# Altium PCB classyTKL_MX.PcbDoc (part 1 of 2)
Units mm, origin at the board's own origin, x right, y up, seen from the top; angles counter-clockwise.
Board outline 346.59 x 122.85 mm, 2 copper layers (Component Side, Bottom Layer), stack 1.571 mm thick; 205 components, 130 nets, 864 pads, 54 vias.
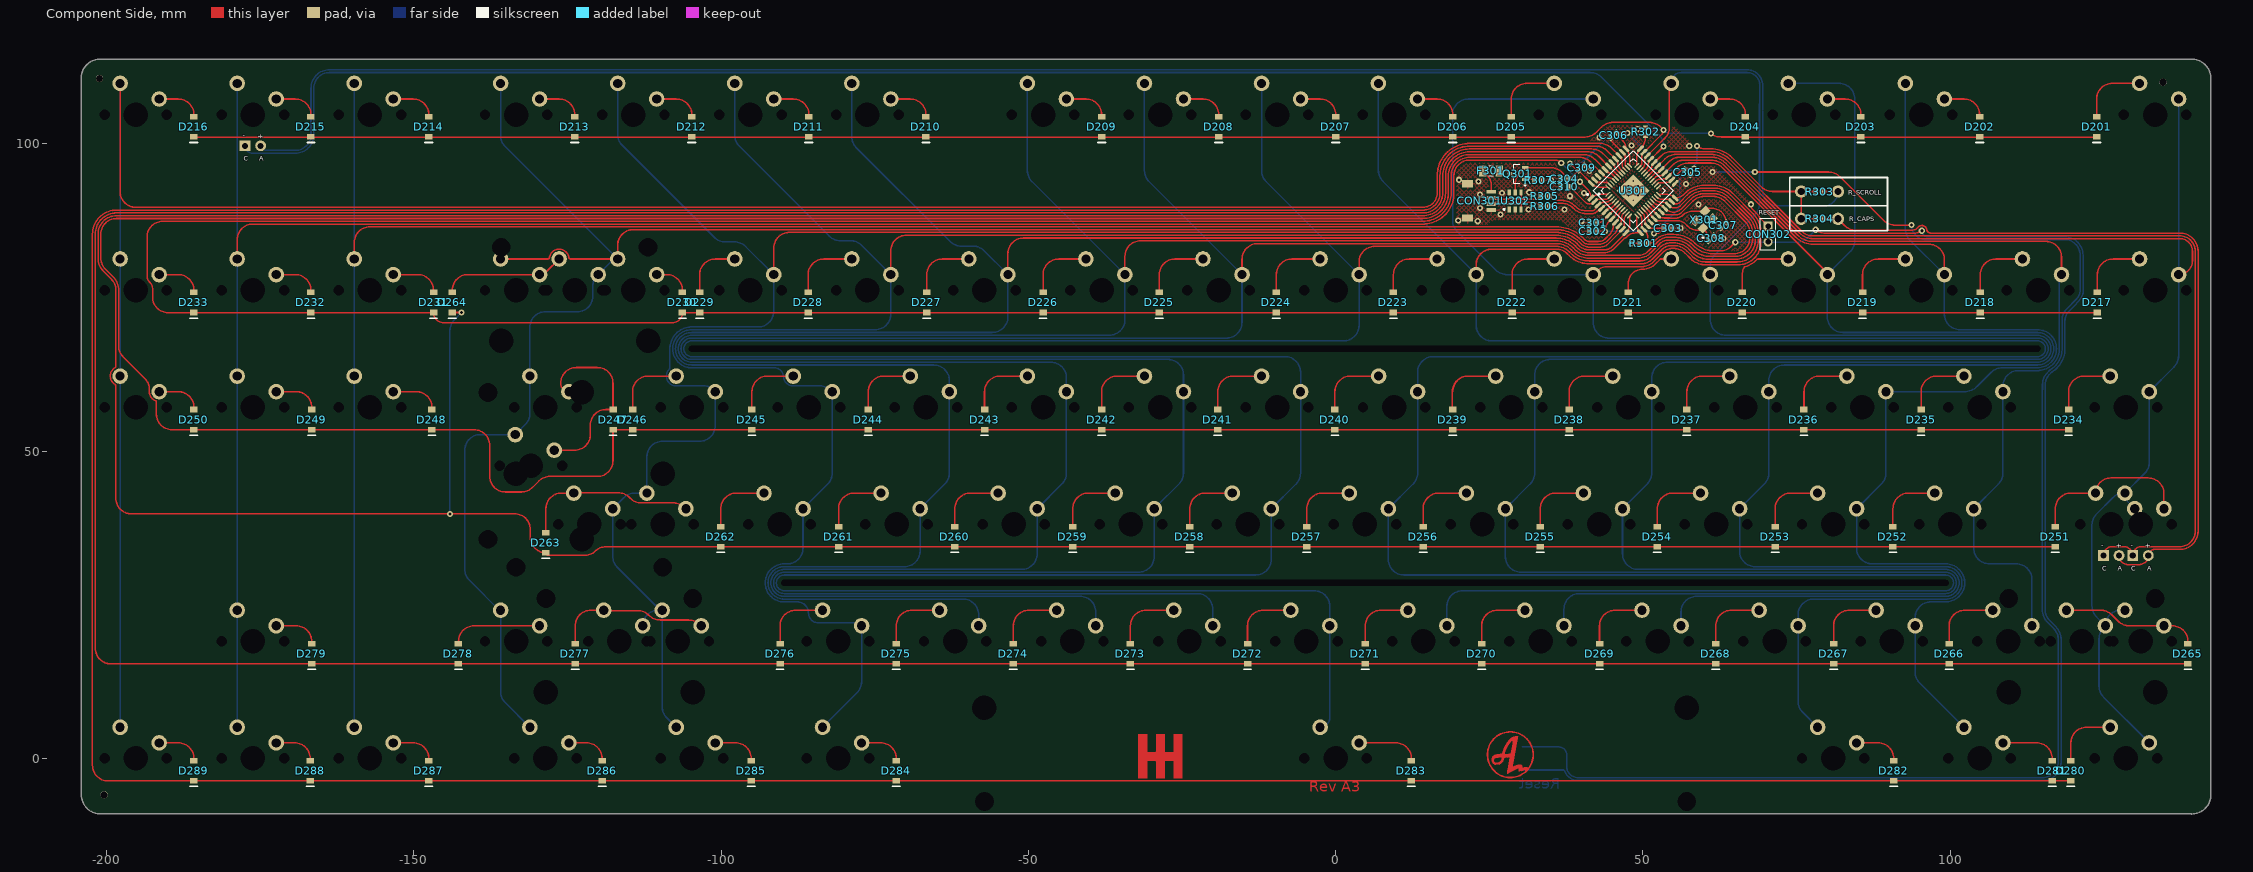
[diagram p0: Component Side view]
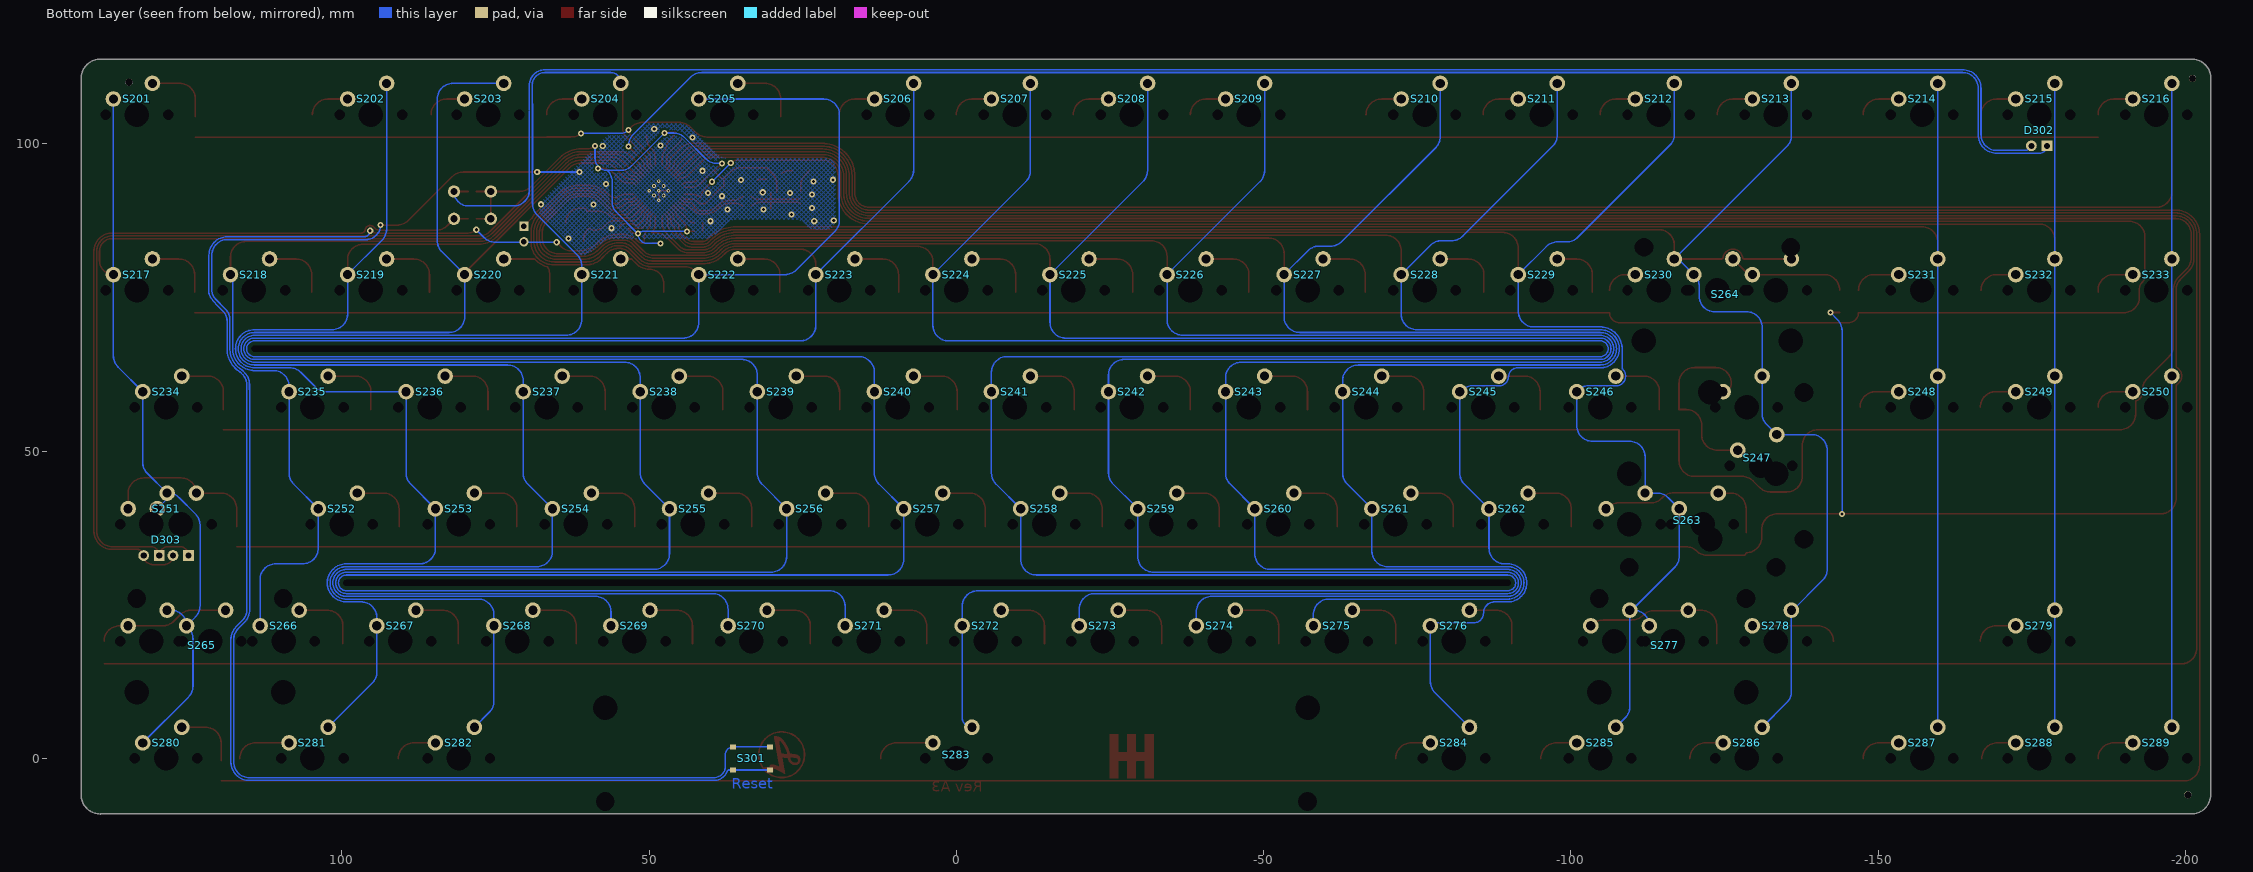
[diagram p1: Bottom Layer view, seen from below]
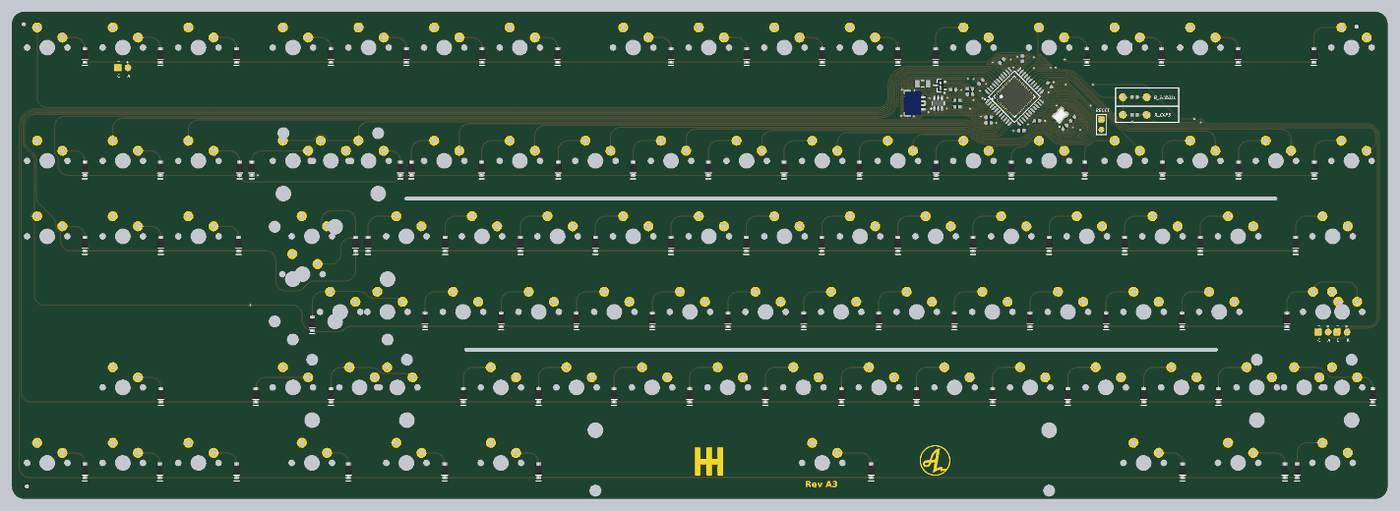
[diagram p3: 3D render of the assembled board from above, using the file's embedded part models]

## Layer stack, top to bottom
Top Solder: solder mask 0.0102, Solder Resist, Dk 3.5
Component Side: signal copper 0.0356
Dielectric 1: core 1.5, FR-4, Dk 4.2
Bottom Layer: signal copper 0.0356
Solder Side: solder mask 0.0102, Solder Resist, Dk 3.5

## Board outline
-204.127,-5.981 cw(c-204.032,-5.896) -204.159,-5.896 -204.159,110.685 cw(c-201.032,110.685) -201.032,113.812 cw(c-201.032,113.685) -200.974,113.798 139.295,113.798 cw(c139.295,110.671) 142.423,110.671 142.423,-5.883 cw(c142.299,-5.915) 142.427,-5.915 cw(c139.299,-5.915) 139.299,-9.042 cw(c139.299,-8.915) 139.233,-9.023 -201,-9.023 cw(c-201,-5.896)

## Design rules (kind name [scope] priority, off if disabled: settings)
Clearance [All] p1: gap=0.2 ignorepadtopadclearanceinfootprint=FALSE except(0: Arc-Hole Track-Hole SMDPad-Hole THPad-Hole Via-Hole Fill-Hole Poly-Hole Region-Hole Text-Hole; 0.254: THPad-THPad THPad-Via THPad-Fill THPad-Poly THPad-Region THPad-Text Via-Via Via-Fill Via-Poly Via-Region Via-Text Fill-Fill Fill-Poly Fill-Region Fill-Text Poly-Poly Poly-Region Poly-Text Region-Region Region-Text Text-Text)
ComponentClearance [InComponent('No Component') And OnLayer('Component Side')] p1: gap=0.254 collisioncheckmode=3 verticalgap=0.254 showdistances=FALSE
DiffPairsRouting DiffPairsRouting_USB [InDifferentialPairClass('All Differential Pairs')] p1: maxlimit=0.254 minlimit=0.203 mostfreqgap=0.203 toplayer_minwidth=0.152 toplayer_maxwidth=0.381 toplayer_prefwidth=0.152 bottomlayer_minwidth=0.152 bottomlayer_maxwidth=0.381 bottomlayer_prefwidth=0.152 maxuncoupledlength=12.7
DiffPairsRouting [All] p2: maxlimit=0.254 minlimit=0.254 mostfreqgap=0.254 toplayer_minwidth=0.381 toplayer_maxwidth=0.381 toplayer_prefwidth=0.381 bottomlayer_minwidth=0.381 bottomlayer_maxwidth=0.381 bottomlayer_prefwidth=0.381 maxuncoupledlength=12.7
HoleSize [All] p1: absolutevalues=TRUE maxlimit=20 minlimit=0.025 maxpercent=80.000 minpercent=20.000
MatchedLengths MatchedLengths_USB_DiffPairs_1 [All] p1: tolerance=0.127 checknetsindiffpair=TRUE checkdiffpairvsdiffpair=FALSE checkxsignals=FALSE checkothers=FALSE
MatchedLengths MatchedLengths_USB_DiffPairs [All] p2: tolerance=0.127 checknetsindiffpair=TRUE checkdiffpairvsdiffpair=FALSE checkxsignals=FALSE checkothers=FALSE
PolygonConnect PolygonConnect_1 [All vs IsVia] p1: connectstyle=Direct reliefconductorwidth=0.254 reliefentries=4 polygonreliefangle="90 Angle" airgapwidth=0.254
PolygonConnect [All] p2: connectstyle=Relief reliefconductorwidth=0.254 reliefentries=4 polygonreliefangle="90 Angle" airgapwidth=0.254
RoutingVias [All] p1: holewidth=0.711 width=1.27 viastyle="Through Hole" minholewidth=0.711 minwidth=1.27 maxholewidth=0.711 maxwidth=1.27
SolderMaskExpansion [All] p1: expansion=0.102 istentingtop=FALSE
Width [All] p1: maxlimit=0.254 minlimit=0.203 preferedwidth=0.254
27 further rules are at their usual default settings.

## Classes and differential pairs
component class Designator: C201 C202 C203 C204 C205 C206 D201 D202 D203 D204 D205 D206 D207 D208 D209 D210 D211 D212 D213 D214 D215 D216 D217 D218 D219 D220 D221 D222 D223 D224 D225 D226 D227 D228 D229 D230 D231 D232 D233 D234 D235 D236 D237 D238 D239 D240 D241 D242 D243 D244 D245 D246 D247 D248 D249 D250 D251 D252 D253 D254 D255 D256 D257 D258 D259 D260 D261 D262 D263 D264 D265 D266 D267 D268 D269 D270 D271 D272 D273 D274 D275 D276 D277 D278 D279 D280 D281 D282 D283 D284 D286 D287 D288 D289 S201 S202 S203 S204 S205 S206 S207 S208 S209 S210 S211 S212 S213 S214 S215 S216 S217 S218 S219 S220 S221 S222 S223 S224 S225 S226 S227 S228 S229 S230 S231 S232 S233 S234 S235 S236 S237 S238 S239 S240 S241 S242 S243 S244 S245 S246 S247 S248 S249 S250 S251 S252 S253 S254 S255 S256 S257 S258 S259 S260 S261 S262 S263 S264 S265 S266 S267 S268 S269 S270 S271 S272 S273 S274 S275 S276 S277 S278 S279 S280 S281 S282 S283 S284 S286 S287 S288 S289
differential pair D: +D_P -D_N
differential pair D_PRE: +D_PRE_P -D_PRE_N

## Components (designator, comment, footprint, x,y, rotation, side; value= is the part's Value field where it differs from the comment)
C301 "" C0603[1608] 41.915,87.178 r0 top value=1uF
C302 "" C0603[1608] 41.915,85.781 r0 top value=0.1uF
C303 "" C0603[1608] 54.107,86.289 r180 top value=0.1uF
C304 "" C0603[1608] 37.211,94.361 r0 top value=4,7uF
C305 "" C0603[1608] 57.277,95.377 r135 top value=0.1uF
C306 "" C0603[1608] 45.217,101.402 r45 top value=0.1uF
C307 "" C0603[1608] 63.076,86.749 r45 top value=15pF
C308 "" C0603[1608] 61.092,84.638 r225 top value=15pF
C309 "" C0603[1608] 40.005,96.139 r225 top value=0.1uF
C310 "" C0603[1608] 37.216,93.02 r0 top value=0.1uF
CON301 "Header 5" "JST SM04B-SRSS-TB" 21.468,93.54 r270 top
CON302 "Header 2" HDR1X2 70.358,86.614 r270 top
D201 "Diode" SOD-123 123.83,102.775 r90 top
D202 "Diode" SOD-123 104.78,102.775 r90 top
D203 "Diode" SOD-123 85.476,102.775 r90 top
D204 "Diode" SOD-123 66.68,102.775 r90 top
D205 "Diode" SOD-123 28.58,102.775 r90 top
D206 "Diode" SOD-123 19.055,102.775 r90 top
D207 "Diode" SOD-123 0.005,102.775 r90 top
D208 "Diode" SOD-123 -19.045,102.775 r90 top
D209 "Diode" SOD-123 -38.095,102.775 r90 top
D210 "Diode" SOD-123 -66.67,102.775 r90 top
D211 "Diode" SOD-123 -85.72,102.775 r90 top
D212 "Diode" SOD-123 -104.77,102.775 r90 top
D213 "Diode" SOD-123 -123.82,102.775 r90 top
D214 "Diode" SOD-123 -147.569,102.775 r90 top
D215 "Diode" SOD-123 -166.746,102.775 r90 top
D216 "Diode" SOD-123 -185.796,102.775 r90 top
D217 "Diode" SOD-123 123.957,74.2 r90 top
D218 "Diode" SOD-123 104.907,74.2 r90 top
D219 "Diode" SOD-123 85.73,74.2 r90 top
D220 "Diode" SOD-123 66.172,74.2 r90 top
D221 "Diode" SOD-123 47.63,74.2 r90 top
D222 "Diode" SOD-123 28.707,74.2 r90 top
D223 "Diode" SOD-123 9.403,74.2 r90 top
D224 "Diode" SOD-123 -9.647,74.2 r90 top
D225 "Diode" SOD-123 -28.697,74.2 r90 top
D226 "Diode" SOD-123 -47.62,74.2 r90 top
D227 "Diode" SOD-123 -66.543,74.2 r90 top
D228 "Diode" SOD-123 -85.847,74.2 r90 top
D229 "Diode" SOD-123 -103.5,74.2 r90 top
D230 "Diode" SOD-123 -106.294,74.2 r90 top
D231 "Diode" SOD-123 -146.807,74.2 r90 top
D232 "Diode" SOD-123 -166.746,74.2 r90 top
D233 "Diode" SOD-123 -185.796,74.2 r90 top
D234 "Diode" SOD-123 119.258,55.15 r90 top
D235 "Diode" SOD-123 95.255,55.15 r90 top
D236 "Diode" SOD-123 76.205,55.15 r90 top
D237 "Diode" SOD-123 57.155,55.15 r90 top
D238 "Diode" SOD-123 37.978,55.15 r90 top
D239 "Diode" SOD-123 19.055,55.15 r90 top
D240 "Diode" SOD-123 -0.122,55.15 r90 top
D241 "Diode" SOD-123 -19.172,55.15 r90 top
D242 "Diode" SOD-123 -38.095,55.15 r90 top
D243 "Diode" SOD-123 -57.145,55.15 r90 top
D244 "Diode" SOD-123 -76.068,55.15 r90 top
D245 "Diode" SOD-123 -94.991,55.15 r90 top
D246 "Diode" SOD-123 -114.422,55.15 r90 top
D247 "Diode" SOD-123 -117.597,55.15 r90 top
D248 "Diode" SOD-123 -147.061,55.15 r90 top
D249 "Diode" SOD-123 -166.619,55.15 r90 top
D250 "Diode" SOD-123 -185.796,55.15 r90 top
D251 "Diode" SOD-123 117.099,36.1 r90 top
D252 "Diode" SOD-123 90.683,36.1 r90 top
D253 "Diode" SOD-123 71.506,36.1 r90 top
D254 "Diode" SOD-123 52.329,36.1 r90 top
D255 "Diode" SOD-123 33.279,36.1 r90 top
D256 "Diode" SOD-123 14.229,36.1 r90 top
D257 "Diode" SOD-123 -4.694,36.1 r90 top
D258 "Diode" SOD-123 -23.744,36.1 r90 top
D259 "Diode" SOD-123 -42.794,36.1 r90 top
D260 "Diode" SOD-123 -61.971,36.1 r90 top
D261 "Diode" SOD-123 -80.894,36.1 r90 top
D262 "Diode" SOD-123 -100.071,36.1 r90 top
D263 "Diode" SOD-123 -128.519,35.108 r90 top
D264 "Diode" SOD-123 -143.759,74.2 r90 top
D265 "Diode" SOD-123 138.689,17.05 r90 top
D266 "Diode" SOD-123 99.827,17.05 r90 top
D267 "Diode" SOD-123 81.031,17.05 r90 top
D268 "Diode" SOD-123 61.854,17.05 r90 top
D269 "Diode" SOD-123 42.931,17.05 r90 top
D270 "Diode" SOD-123 23.754,17.05 r90 top
D271 "Diode" SOD-123 4.831,17.05 r90 top
D272 "Diode" SOD-123 -14.346,17.05 r90 top
D273 "Diode" SOD-123 -33.396,17.05 r90 top
D274 "Diode" SOD-123 -52.446,17.05 r90 top
D275 "Diode" SOD-123 -71.496,17.05 r90 top
D276 "Diode" SOD-123 -90.419,17.05 r90 top
D277 "Diode" SOD-123 -123.75,17.05 r90 top
D278 "Diode" SOD-123 -142.743,17.05 r90 top
D279 "Diode" SOD-123 -166.619,17.05 r90 top
D280 "Diode" SOD-123 119.639,-2 r90 top
D281 "Diode" SOD-123 116.591,-2 r90 top
D282 "Diode" SOD-123 90.81,-2 r90 top
D283 "Diode" SOD-123 12.324,-2 r90 top
D284 "Diode" SOD-123 -71.496,-2 r90 top
D285 "Diode" SOD-123 -95.118,-2 r90 top
D286 "Diode" SOD-123 -119.375,-2 r90 top
D287 "Diode" SOD-123 -147.569,-2 r90 top
D288 "Diode" SOD-123 -166.873,-2 r90 top
D289 "Diode" SOD-123 -185.796,-2 r90 top
D302 "LED0" "MX-SWITCH - LED" -176.213,104.775 r180 bottom
D303 "LED0" "MX-SWITCH - CAPS - LED NO SWITCH" 126.205,38.1 r180 bottom locked
F301 "Fuse" C1206[3216] 25.273,95.631 r0 top
Q301 "PMOS-2" SOT-23-3 29.639,95.179 r180 top
R301 "Res1" R0603[1608] 50.165,83.82 r0 top value=10K
R302 "Res1" R0603[1608] 50.419,101.981 r90 top value=10K
R303 "Res1" "R0603[1608] - THT" 78.745,92.258 r0 top value=150
R304 "Res1" "R0603[1608] - THT" 78.745,87.813 r0 top value=150
R305 "Res1" R0603[1608] 34.041,91.496 r180 top value=22
R306 "Res1" R0603[1608] 34.041,89.845 r180 top value=22
R307 "Res1" R0603[1608] 33.02,94.107 r0 top value=10K
S201 "MX" "MX-SWITCH - SWITCHED POL" 133.349,104.775 r180 bottom locked
S202 "MX" MX-SWITCH 95.249,104.775 r180 bottom locked
S203 "MX" MX-SWITCH 76.199,104.775 r180 bottom locked
S204 "MX" MX-SWITCH 57.149,104.775 r180 bottom locked
S205 "MX" "MX-switch - switched pol" 38.099,104.775 r180 bottom locked
S206 "MX" MX-SWITCH 9.494,104.775 r180 bottom locked
S207 "MX" MX-SWITCH -9.526,104.775 r180 bottom locked
S208 "MX" MX-SWITCH -28.576,104.775 r180 bottom locked
S209 "MX" MX-SWITCH -47.626,104.775 r180 bottom locked
S210 "MX" MX-SWITCH -76.201,104.775 r180 bottom locked
S211 "MX" MX-SWITCH -95.251,104.775 r180 bottom locked
S212 "MX" MX-SWITCH -114.301,104.775 r180 bottom locked
S213 "MX" MX-SWITCH -133.351,104.775 r180 bottom locked
S214 "MX" MX-SWITCH -157.162,104.775 r180 bottom locked
S215 "MX" MX-SWITCH -176.213,104.775 r180 bottom locked
S216 "MX" MX-SWITCH -195.263,104.775 r180 bottom locked
S217 "MX" "MX-SWITCH - SWITCHED POL" 133.349,76.2 r180 bottom locked
S218 "MX" "MX-SWITCH - SWITCHED POL" 114.299,76.2 r180 bottom locked
S219 "MX" "MX-SWITCH - SWITCHED POL" 95.249,76.2 r180 bottom locked
S220 "MX" "MX-SWITCH - SWITCHED POL" 76.199,76.2 r180 bottom locked
S221 "MX" "MX-SWITCH - SWITCHED POL" 57.149,76.2 r180 bottom locked
S222 "MX" "MX-SWITCH - SWITCHED POL" 38.099,76.2 r180 bottom locked
S223 "MX" "MX-SWITCH - SWITCHED POL" 19.049,76.2 r180 bottom locked
S224 "MX" "MX-SWITCH - SWITCHED POL" -0.001,76.2 r180 bottom locked
S225 "MX" "MX-SWITCH - SWITCHED POL" -19.051,76.2 r180 bottom locked
S226 "MX" "MX-SWITCH - SWITCHED POL" -38.101,76.2 r180 bottom
S227 "MX" "MX-SWITCH - SWITCHED POL" -57.151,76.2 r180 bottom locked
S228 "MX" "MX-SWITCH - SWITCHED POL" -76.201,76.2 r180 bottom locked
S229 "MX" "MX-SWITCH - SWITCHED POL" -95.251,76.2 r180 bottom locked
S230 "MX" MX-SWITCH -114.301,76.2 r180 bottom locked
S231 "MX" MX-SWITCH -157.162,76.2 r180 bottom locked
S232 "MX" MX-SWITCH -176.213,76.2 r180 bottom locked
S233 "MX" MX-SWITCH -195.263,76.2 r180 bottom locked
S234 "MX" "MX-SWITCH - 1.5U - SWITCHED POL" 128.587,57.15 r180 bottom locked
S235 "MX" "MX-SWITCH - SWITCHED POL" 104.774,57.15 r180 bottom locked
S236 "MX" "MX-SWITCH - SWITCHED POL" 85.724,57.15 r180 bottom locked
S237 "MX" "MX-SWITCH - SWITCHED POL" 66.674,57.15 r180 bottom locked
S238 "MX" "MX-SWITCH - SWITCHED POL" 47.624,57.15 r180 bottom locked
S239 "MX" "MX-SWITCH - SWITCHED POL" 28.574,57.15 r180 bottom locked
S240 "MX" "MX-SWITCH - SWITCHED POL" 9.524,57.15 r180 bottom locked
S241 "MX" "MX-SWITCH - SWITCHED POL" -9.526,57.15 r180 bottom locked
S242 "MX" "MX-SWITCH - SWITCHED POL" -28.576,57.15 r180 bottom locked
S243 "MX" "MX-SWITCH - SWITCHED POL" -47.626,57.15 r180 bottom locked
S244 "MX" "MX-SWITCH - SWITCHED POL" -66.676,57.15 r180 bottom locked
S245 "MX" "MX-SWITCH - SWITCHED POL" -85.726,57.15 r180 bottom locked
S246 "MX" "MX-SWITCH - SWITCHED POL" -104.776,57.15 r180 bottom locked
S247 "MX" "MX-SWITCH - PIPE_ISO_ENTER" -128.588,57.15 r0 bottom locked
S248 "MX" MX-SWITCH -157.162,57.15 r180 bottom locked
S249 "MX" MX-SWITCH -176.213,57.15 r180 bottom locked
S250 "MX" MX-SWITCH -195.263,57.15 r180 bottom locked
S251 "MX" "MX-SWITCH - CAPS" 126.206,38.1 r180 bottom locked
S252 "MX" "MX-SWITCH - SWITCHED POL" 100.012,38.1 r180 bottom locked
S253 "MX" "MX-SWITCH - SWITCHED POL" 80.962,38.1 r180 bottom locked
S254 "MX" "MX-SWITCH - SWITCHED POL" 61.912,38.1 r180 bottom locked
S255 "MX" "MX-SWITCH - SWITCHED POL" 42.862,38.1 r180 bottom locked
S256 "MX" "MX-SWITCH - SWITCHED POL" 23.812,38.1 r180 bottom locked
S257 "MX" "MX-SWITCH - SWITCHED POL" 4.762,38.1 r180 bottom locked
S258 "MX" "MX-SWITCH - SWITCHED POL" -14.288,38.1 r180 bottom locked
S259 "MX" "MX-SWITCH - SWITCHED POL" -33.338,38.1 r180 bottom locked
S260 "MX" "MX-SWITCH - SWITCHED POL" -52.388,38.1 r180 bottom locked
S261 "MX" "MX-SWITCH - SWITCHED POL" -71.438,38.1 r180 bottom locked
S262 "MX" "MX-SWITCH - SWITCHED POL" -90.488,38.1 r180 bottom locked
S263 "MX" "MX-switch - Enter_ANSI_ISO_KEY" -121.451,38.1 r180 bottom locked
S264 "MX" "MX-SWITCH - BACKSPACE" -123.826,76.2 r180 bottom locked
S265 "MX" "MX-switch - Left shift" 121.443,19.05 r180 bottom locked
S266 "MX" "MX-SWITCH - SWITCHED POL" 109.479,19.05 r180 bottom locked
S267 "MX" "MX-SWITCH - SWITCHED POL" 90.487,19.05 r180 bottom locked
S268 "MX" "MX-SWITCH - SWITCHED POL" 71.437,19.05 r180 bottom locked
S269 "MX" "MX-SWITCH - SWITCHED POL" 52.387,19.05 r180 bottom locked
S270 "MX" "MX-SWITCH - SWITCHED POL" 33.337,19.05 r180 bottom locked
S271 "MX" "MX-SWITCH - SWITCHED POL" 14.287,19.05 r180 bottom locked
S272 "MX" "MX-SWITCH - SWITCHED POL" -4.763,19.05 r180 bottom locked
S273 "MX" "MX-SWITCH - SWITCHED POL" -23.813,19.05 r180 bottom locked
S274 "MX" "MX-SWITCH - SWITCHED POL" -42.862,19.05 r180 bottom locked
S275 "MX" "MX-SWITCH - SWITCHED POL" -61.913,19.05 r180 bottom locked
S276 "MX" "MX-SWITCH - SWITCHED POL" -80.963,19.05 r180 bottom locked
S277 "MX" "MX-SWITCH - RIGHT SHIFT" -116.581,19.05 r180 bottom locked
S278 "MX" MX-switch -133.351,19.05 r180 bottom locked
S279 "MX" MX-SWITCH -176.213,19.05 r180 bottom locked
S280 "MX" "MX-switch - 1.5U - switched pol" 128.587,0 r180 bottom locked
S281 "MX" MX-SWITCH 104.775,0 r180 bottom locked
S282 "MX" "MX-switch - 1.5U" 80.962,0 r180 bottom locked
S283 "MX" "MX-SWITCH - 7U SPACE" 0,0 r0 bottom locked
S284 "MX" "MX-switch - 1.5U" -80.962,0 r180 bottom locked
S285 "MX" MX-SWITCH -104.775,0 r180 bottom
S286 "MX" "MX-switch - 1.5U" -128.588,0 r180 bottom locked
S287 "MX" MX-SWITCH -157.163,0 r180 bottom locked
S288 "MX" MX-SWITCH -176.213,0 r180 bottom locked
S289 "MX" MX-SWITCH -195.263,0 r180 bottom locked
S301 "SW-PB" "XKB Switch" 33.337,0 r0 bottom
U301 "ATMEGA32U4" ATMEGA32U4-COMBO 48.411,92.392 r45 top
U302 "SRV05" SOT-23-6 29.215,90.734 r90 top
X301 "XTAL" XTAL-3225 59.949,87.686 r45 top

## Footprints (in the part's own frame and the unit in brackets; to place one, negate y for a bottom-side part, rotate by r counter-clockwise, add the part's x,y. Pads: shape width x height; smd on the part's side, far side on the other; paste and mask are expansions set on the pad)
ATMEGA32U4-COMBO [mm] "QFP, 44-Leads, Body 9,95x9,95mm, Pitch 0,80mm, IPC Medium Density"
  rect 1.35x0.5 smd: 1(-5.675,4)
  oval 1.05x0.25 smd: 1(-3.325,2.5) 2(-3.325,2) 3(-3.325,1.5) 4(-3.325,1) 5(-3.325,0.5) 6(-3.325,0) 7(-3.325,-0.5) 8(-3.325,-1) 9(-3.325,-1.5) 10(-3.325,-2) 11(-3.325,-2.5) 23(3.325,-2.5) 24(3.325,-2) 25(3.325,-1.5) 26(3.325,-1) 27(3.325,-0.5) 28(3.325,0) 29(3.325,0.5) 30(3.325,1) 31(3.325,1.5) 32(3.325,2) 33(3.325,2.5)
  oval 1.35x0.5 smd: 2(-5.675,3.2) 3(-5.675,2.4) 4(-5.675,1.6) 5(-5.675,0.8) 6(-5.675,0) 7(-5.675,-0.8) 8(-5.675,-1.6) 9(-5.675,-2.4) 10(-5.675,-3.2) 11(-5.675,-4) 23(5.675,-4) 24(5.675,-3.2) 25(5.675,-2.4) 26(5.675,-1.6) 27(5.675,-0.8) 28(5.675,0) 29(5.675,0.8) 30(5.675,1.6) 31(5.675,2.4) 32(5.675,3.2) 33(5.675,4)
  oval 0.5x1.35 smd: 12(-4,-5.675) 13(-3.2,-5.675) 14(-2.4,-5.675) 15(-1.6,-5.675) 16(-0.8,-5.675) 17(0,-5.675) 18(0.8,-5.675) 19(1.6,-5.675) 20(2.4,-5.675) 21(3.2,-5.675) 22(4,-5.675) 34(4,5.675) 35(3.2,5.675) 36(2.4,5.675) 37(1.6,5.675) 38(0.8,5.675) 39(0,5.675) 40(-0.8,5.675) 41(-1.6,5.675) 42(-2.4,5.675) 43(-3.2,5.675) 44(-4,5.675)
  oval 0.25x1.05 smd: 12(-2.5,-3.325) 13(-2,-3.325) 14(-1.5,-3.325) 15(-1,-3.325) 16(-0.5,-3.325) 17(0,-3.325) 18(0.5,-3.325) 19(1,-3.325) 20(1.5,-3.325) 21(2,-3.325) 22(2.5,-3.325) 34(2.5,3.325) 35(2,3.325) 36(1.5,3.325) 37(1,3.325) 38(0.5,3.325) 39(0,3.325) 40(-0.5,3.325) 41(-1,3.325) 42(-1.5,3.325) 43(-2,3.325) 44(-2.5,3.325)
  rect 3.81x3.81 smd paste-1000: 43(0,0)
  silkscreen extent -5.8,-4.6 4.6,4.92, body extent -3.6,-3.6 3.6,3.6, height 1
C0603[1608] [mm] "Chip Resistor, 2-Leads, Body 1,57x0,80mm, IPC Medium Density"
  rect 0.8x0.85 smd: 1(-0.65,0) 2(0.65,0)
  body extent -0.83,-0.43 0.82,0.43, height 0.5
C1206[3216] [mm]
  rect 1.2x1.8 smd: 1(-1.35,0) 2(1.35,0)
  silkscreen extent -0.35,-0.8 0.35,0.8, body extent -1.6,-0.9 1.6,0.9, height 1.2
HDR1X2 [mm] "Connector; Header; 2 Position"
  rect 1.5x1.5 hole 0.9 mask+0.102: 1(0,0)
  round 1.5 hole 0.9 mask+0.102: 2(2.54,0)
  silkscreen extent -1.27,-1.27 3.81,1.27
"JST SM04B-SRSS-TB" [mm]
  rect 0.6x1.55 smd: 1(1.3,3.875) 2(2.3,3.875) 3(3.3,3.875) 4(4.3,3.875)
  rect 1.2x1.8 smd: 5(0,0) 5(5.6,0)
  body extent -0.21,-0.76 5.79,4.19, height 3.25
MX-SWITCH [mm]
  round 2.54 hole 1.499 mask+0.102: 1(-3.81,2.54) 2(2.54,5.08)
  round 1 hole 1.702 unplated: ""(-5.08,0) ""(5.08,0)
  round 1 hole 3.988 unplated: ""(0,0)
MX-switch [mm]
  round 2.54 hole 1.499 mask+0.102: 1(-3.81,2.54) 2(2.54,5.08)
  round 1 hole 1.702 unplated: ""(-5.08,0) ""(5.08,0)
  round 1 hole 3.988 unplated: ""(0,0)
"MX-switch - 1.5U" [mm]
  round 2.54 hole 1.499 mask+0.102: 1(-3.81,2.54) 2(2.54,5.08)
  round 1 hole 1.702 unplated: ""(-5.08,0) ""(5.08,0)
  round 1 hole 3.988 unplated: ""(0,0)
  round 1 on Mech14: ""(0,0)
"MX-SWITCH - 1.5U - SWITCHED POL" [mm]
  round 2.54 hole 1.499 mask+0.102: 1(2.54,5.08) 2(-3.81,2.54)
  round 1 hole 1.702 unplated: ""(-5.08,0) ""(5.08,0)
  round 1 hole 3.988 unplated: ""(0,0)
  round 1 on Mech14: ""(0,0)
"MX-switch - 1.5U - switched pol" [mm]
  round 2.54 hole 1.499 mask+0.102: 1(2.54,5.08) 2(-3.81,2.54)
  round 1 hole 1.702 unplated: ""(-5.08,0) ""(5.08,0)
  round 1 hole 3.988 unplated: ""(0,0)
  round 1 on Mech14: ""(0,0)
"MX-SWITCH - 7U SPACE" [mil]
  round 100 hole 59 mask+4: 1(150,-100) 2(-100,-200)
  round 60 hole 157.01 unplated: ""(-2250,-325) ""(2250,-325)
  round 60 hole 120 unplated: ""(-2250,275) ""(2250,275)
  round 39.37 hole 67.01 unplated: ""(-200,0) ""(200,0)
  round 39.37 hole 157.01 unplated: ""(0,0)
  round 39.37 on Mech14: ""(0,0)
"MX-SWITCH - BACKSPACE" [mil]
  round 100 hole 59 mask+4: 1(100,200) 1(225,100) 2(-150,100) 2(475,200)
  round 60 hole 157.01 unplated: ""(-470,-325) ""(470,-325)
  round 60 hole 120 unplated: ""(-470,275) ""(470,275)
  round 39.37 hole 67.01 unplated: ""(-200,0) ""(175,0) ""(200,0) ""(575,0)
  round 39.37 hole 157.01 unplated: ""(0,0) ""(375,0)
  round 39.37 on Mech14: ""(0,0) ""(375,0)
"MX-SWITCH - CAPS" [mm]
  round 2.54 hole 1.499 mask+0.102: 1(-8.572,2.54) 1(2.54,5.08) 2(-3.81,2.54) 2(-2.222,5.08)
  round 1 hole 1.702 unplated: ""(-9.842,0) ""(5.08,0)
  round 1 hole 3.988 unplated: ""(-4.763,0) ""(0,0)
  round 1 on Mech14: ""(-4.763,0) ""(0,0)
"MX-SWITCH - CAPS - LED NO SWITCH" [mm]
  round 1.75 hole 1 mask+0.102: 1(-6.033,-5.08) 1(-1.27,-5.08)
  rect 1.75x1.75 hole 1 mask+0.102: 2(-3.493,-5.08) 2(1.27,-5.08)
  round 1 on Mech14: ""(0,0)
"MX-switch - Enter_ANSI_ISO_KEY" [mm]
  round 2.54 hole 1.499 mask+0.102: 1(-15.716,2.54) 1(2.54,5.08) 2(-9.366,5.08) 2(-3.81,2.54)
  round 1 hole 1.702 unplated: ""(-16.986,0) ""(-6.826,0) ""(-5.08,0) ""(5.08,0)
  round 1.524 hole 3.048 unplated: ""(-11.938,-6.985) ""(11.938,-6.985)
  round 1.524 hole 3.988 unplated: ""(-11.938,8.255) ""(11.938,8.255)
  round 1 hole 3.988 unplated: ""(-11.906,0) ""(0,0)
  round 1 on Mech14: ""(-11.906,0) ""(-11.906,0) ""(0,0) ""(0,0)
"MX-SWITCH - LED" [mm]
  round 1.75 hole 1 mask+0.102: 1(-1.27,-5.08)
  rect 1.75x1.75 hole 1 mask+0.102: 2(1.27,-5.08)
  round 1 on Mech14: ""(0,0)
"MX-switch - Left shift" [mil]
  round 100 hole 59 mask+4: 1(-525,100) 1(100,200) 2(-275,200) 2(-150,100)
  round 39.37 hole 67.01 unplated: ""(-575,0) ""(-200,0) ""(-175,0) ""(200,0)
  round 60 hole 157.01 unplated: ""(-470,-325) ""(470,-325)
  round 60 hole 120 unplated: ""(-470,275) ""(470,275)
  round 39.37 hole 157.01 unplated: ""(-375,0) ""(0,0)
  round 39.37 on Mech14: ""(-375,0) ""(0,0)
"MX-SWITCH - PIPE_ISO_ENTER" [mm]
  round 2.54 hole 1.499 mask+0.102: 1(1.429,6.985) 1(3.81,-2.54) 2(-4.921,4.445) 2(-2.54,-5.08)
  round 1.524 hole 3.048 unplated: ""(-9.366,-2.413) ""(-9.366,21.463)
  round 1 hole 1.702 unplated: ""(-7.461,9.525) ""(-5.08,0) ""(2.699,9.525) ""(5.08,0)
  round 1 hole 3.988 unplated: ""(-2.381,9.525) ""(0,0)
  round 1 on Mech14: ""(-2.381,9.525) ""(-2.381,9.525) ""(0,0) ""(0,0)
  round 1.524 hole 3.988 unplated: ""(5.874,-2.413) ""(5.874,21.463)
"MX-SWITCH - RIGHT SHIFT" [mil]
  round 100 hole 59 mask+4: 1(-525,100) 1(100,200) 2(-275,200) 2(-150,100)
  round 39.37 hole 67.01 unplated: ""(-575,0) ""(-200,0) ""(-175,0) ""(200,0)
  round 60 hole 157.01 unplated: ""(-470,-325) ""(470,-325)
  round 60 hole 120 unplated: ""(-470,275) ""(470,275)
  round 39.37 hole 157.01 unplated: ""(-375,0) ""(0,0)
  round 39.37 on Mech14: ""(-375,0) ""(0,0)
"MX-SWITCH - SWITCHED POL" [mm]
  round 2.54 hole 1.499 mask+0.102: 1(2.54,5.08) 2(-3.81,2.54)
  round 1 hole 1.702 unplated: ""(-5.08,0) ""(5.08,0)
  round 1 hole 3.988 unplated: ""(0,0)
"MX-switch - switched pol" [mm]
  round 2.54 hole 1.499 mask+0.102: 1(2.54,5.08) 2(-3.81,2.54)
  round 1 hole 1.702 unplated: ""(-5.08,0) ""(5.08,0)
  round 1 hole 3.988 unplated: ""(0,0)
R0603[1608] [mm] "Chip Resistor, 2-Leads, Body 1,57x0,80mm, IPC Medium Density"
  rect 0.8x0.85 smd: 1(-0.65,0) 2(0.65,0)
  body extent -0.83,-0.43 0.82,0.43, height 0.5
"R0603[1608] - THT" [mm] "Chip Resistor, 2-Leads, Body 1,57x0,80mm, IPC Medium Density"
  round 2 hole 1.2: 1(-3,0) 2(3,0)
  rect 0.8x0.85 smd: 1(-0.65,0) 2(0.65,0)
  body extent -0.83,-0.43 0.82,0.43, height 0.5
SOD-123 [mm]
  rect 0.91x1.22 smd: 1(1.635,0) 2(-1.635,0)
  silkscreen extent -2.54,-0.64 -2.54,0.63, body extent -1.87,-0.85 1.88,0.85, height 1.2
SOT-23-3 [mm] "3.3v regulator, used in Windsond S2 proto 1"
  rect 1x0.55 smd: 1(-1.2,0.95) 2(-1.2,-0.95) 3(1.2,0)
  silkscreen extent -1.33,-1.55 0.7,1.95, body extent -1.45,-1.5 1.1,1.5, height 1
SOT-23-6 [mm]
  rect 1x0.55 smd: 1(-1.375,0.95) 2(-1.375,0) 3(-1.375,-0.95) 4(1.375,-0.95) 5(1.375,0) 6(1.375,0.95)
  silkscreen extent -1.5,-1.55 0.46,1.92, body extent -1.37,-1.44 1.47,1.49, height 1.05
"XKB Switch" [mm] "XKB Enterprise TS-1187A-C-D-B"
  rect 1x0.75 smd: 1(-3,1.875) 1(3,1.875) 2(-3,-1.875) 2(3,-1.875)
  body extent -3.25,-2.55 3.25,2.55, height 2
XTAL-3225 [mm]
  rect 1.4x1.2 smd: 1(-1.1,-0.85) 2(1.1,-0.85) 3(1.1,0.85) 4(-1.1,0.85)
  silkscreen extent -2.28,-2.03 -2.03,-1.78, body extent -1.6,-1.25 1.6,1.25, height 0.65

## Part data
C301: library part Cap, "Capacitor", LCSC MFG="Samsung Electro-Mechanics", LCSC Part #=C15849, MFG=KEMET, MFGPN=C0603C104M5RACTU, MRF.Part=CL10A105KB8NNNC, Version="0603 imperial"
C302 C303 C305 C306 C309 C310: library part Cap, "Capacitor", LCSC MFG=YAGEO, LCSC Part #=C14663, MFG=KEMET, MFGPN=C0603C104M5RACTU, MRF.Part=CC0603KRX7R9BB104, Version="0603 imperial"
C304: library part Cap, "Capacitor", LCSC MFG="Samsung Electro-Mechanics", LCSC Part #=C19666, MRF.Part=CL10A475KO8NNNC
C307 C308: library part Cap, "Capacitor", LCSC MFG="Samsung Electro-Mechanics", LCSC Part #=C1644, MRF.Part=CL10C150JB8NNNC, Version="0603 imperial"
CON301: "JST for USB daughter board", LCSC MFG="JST Sales America", LCSC Part #=C160404, MFG="JST Sales America Inc.", MFGPN=SM04B-SRSS-TB(LF)(SN), MRF.Part=SM04B-SRSS-TB(LF)(SN)
CON302: "Header, 2-Pin"
D201 D202 D203 D204 D205 D206 D207 D208 D209 D210 D211 D212 D213 D214 D215 D216 D217 D218 D219 D220 D221 D222 D223 D224 D225 D226 D227 D228 D229 D230 D231 D232 D233 D234 D235 D236 D237 D238 D239 D240 D241 D242 D243 D244 D245 D246 D247 D248 D249 D250 D251 D252 D253 D254 D255 D256 D257 D258 D259 D260 D261 D262 D263 D264 D265 D266 D267 D268 D269 D270 D271 D272 D273 D274 D275 D276 D277 D278 D279 D280 D281 D282 D283 D284 D285 D286 D287 D288 D289: "Default Diode", LCSC MFG=ST(Semtech), LCSC Part #=C81598, MRF.Part=1N4148W, Version=SOD-123
D302 D303: "Typical INFRARED GaAs LED"
F301: library part "Fuse Thermal", "Thermal Fuse", LCSC MFG="Shenzhen JDT Fuse", LCSC Part #=C135338, MFG="Bel Fuse Inc.", MFGPN=0ZCJ0050FF2G, MRF.Part=ASMD1206-050
Q301: "P-Channel Power MOSFET", LCSC MFG="Vishay Intertech", LCSC Part #=C10487, MRF.Part=SI2301CDS-T1-GE3, Version=SOT23-3
R301 R302 R307: "Resistor", LCSC MFG="Uniroyal Elec", LCSC Part #=C25804, MFG="Panasonic Electronic Components", MFGPN=ERJ-3EKF5101V, MRF.Part=0603WAF1002T5E, Version="0603 imperial"
R303 R304: "Resistor", Version="0603 imperial"
R305 R306: "Resistor", LCSC MFG="Uniroyal Elec", LCSC Part #=C23345, MFG="Panasonic Electronic Components", MFGPN=ERJ-3EKF5101V, MRF.Part=0603WAF220JT5E, Version="0603 imperial"
S201 S202 S203 S204 S205 S206 S207 S208 S209 S210 S211 S212 S213 S214 S215 S216 S217 S218 S219 S220 S221 S222 S223 S224 S225 S226 S227 S228 S229 S230 S231 S232 S233 S235 S236 S237 S238 S239 S240 S241 S242 S243 S244 S245 S246 S247 S248 S249 S250 S251 S252 S253 S254 S255 S256 S257 S258 S259 S260 S261 S262 S263 S264 S265 S266 S267 S268 S269 S270 S271 S272 S273 S274 S275 S276 S277 S278 S279 S280 S281 S282 S283 S284 S285 S286 S287 S288 S289: library part SW-PB, "Switch"
S234: library part SW-PB, "TAB"
S301: "Switch", LCSC MFG="XKB Enterprise", LCSC Part #=C318888, MFG=C&K, MFGPN="PTS645SM43SMTR92 LFS", MRF.Part=TS-1187A-C-D-B
U301: "MCU", LCSC MFG="Microchip Tech", LCSC Part #=C45874, MFG="Microchip Technology", MFGPN=ATMEGA32U4-MUR, MRF.Part=ATMEGA32U4-MUR
U302: LCSC MFG="ProTek Devices", LCSC Part #=C85364, MRF.Part=SRV05-4-P-T7
X301: "Crystal Oscillator", LCSC MFG="Yangxing Tech", LCSC Part #=C13738, MRF.Part=X322516MLB4SI

## Free pads (board coordinates)
  round 1.152 hole 1.152 unplated paste+0.148 mask+0.148: ""(-201.163,110.673) ""(-200.401,-5.913) ""(134.625,110.038)
  round 0 hole 1 slot 220 at 0 deg unplated: ""(4.704,66.675)
  round 0 hole 1 slot 190 at 0 deg unplated: ""(4.763,28.575)

## Via types
v1: diameter 1, hole 0.5, Component Side to Bottom Layer, tented both sides, 45 vias
v2: diameter 0.6, hole 0.3, Component Side to Bottom Layer, tented bottom, 9 vias

## Nets (pads, with @x,y where several pads share a name; then routed paths per layer and width w, separated by ;. In a path a pad name is that pad's centre, name@x,y a point inside that pad or via, vN(x,y) a via of type N, cw(c..) or ccw(c..) an arc to the next point about the centre after c; other vN are vias at no path point)
caps_led: D303.2 U301.29 | length 162.3
  Component Side w0.254: U301.29@50.408,95.096 51.29,95.978 ccw(c50.928,96.341) 51.44,96.341 cw(c51.953,96.341) 51.59,96.703 U301.29@51.858,96.97 52.898,98.01 cw(c54.694,96.214) 54.694,98.754 61.075,98.754 cw(c61.075,94.398) 64.156,97.478 75.841,85.793 ccw(c77.637,87.589) 77.637,85.049 137.346,85.049 cw(c137.346,82.509) 139.886,82.509 139.886,37.013 cw(c137.346,37.013) 137.346,34.473 131.151,34.473 ccw(c131.151,33.02) 130.242,34.154 ccw(c131.151,33.02) 130.017,33.929 ccw(c131.151,33.02) D303.2@129.698,33.02 ccw(c128.245,33.02) 128.245,34.473 126.388,34.473 ccw(c126.388,33.02) D303.2@124.935,33.02
col1: S201.2 S217.2 S234.2 S251.2 S265.2 S280.2 U301.28 | length 224.8
  Component Side w0.254: U301.28@50.762,94.743 U301.28@52.423,96.404 53.575,97.556 cw(c55.371,95.76) 55.371,98.3 61.075,98.3 cw(c61.075,94.398) 63.833,97.158 cw(c61.075,94.398) 63.835,97.157 75.52,85.472 ; 75.52,85.471 ccw(c77.637,87.589) 77.637,84.595 137.346,84.595 cw(c137.346,82.509) 139.116,83.614 cw(c137.346,82.509) 139.432,82.509 139.432,81.013 cw(c137.159,81.013) S217.2@137.159,78.74
  Bottom Layer w0.254: S265.2@128.428,24.13 127.793,24.13 ccw(c127.793,21.59) S265.2@125.253,21.59 ; S251.2@130.016,40.64 128.428,42.227 S251.2@128.428,43.18 ; 131.958,46.71 131.958,46.774 ; S280.2@132.397,2.54 124.955,9.982 cw(c126.751,11.778) 124.211,11.778 124.211,19.496 cw(c126.751,19.496) 124.955,21.292 S265.2@125.253,21.59 ; S201.2@137.159,107.315 S217.2@137.159,78.74 137.159,65.505 cw(c134.619,65.505) 136.416,63.709 S234.2@132.397,59.69 132.397,48.201 cw(c129.857,48.201) 131.958,46.774 ; S265.2@125.253,21.59 123.812,23.031 cw(c125.608,24.827) 123.068,24.827 123.068,37.993 cw(c125.608,37.993) 123.812,39.789 126.46,42.436 cw(c128.256,40.64) 128.256,43.18 S251.2@128.428,43.18 ; S251.2@128.428,43.18 131.653,46.405 ccw(c129.857,48.201) 131.958,46.774
col2: S218.2 S235.2 S252.2 S266.2 U301.27 | length 151
  Component Side w0.254: U301.27@51.115,94.389 51.82,95.093 cw(c52.202,94.711) 52.202,95.252 ccw(c52.202,95.735) 52.544,95.393 U301.27@52.989,95.839 54.253,97.102 cw(c56.049,95.306) 56.049,97.846 61.075,97.846 cw(c61.075,94.398) 63.513,96.836 75.199,85.151 ccw(c77.637,87.589) 77.637,84.141 115.569,84.141 cw(c115.569,81.601) 118.109,81.601 S218.2@118.109,78.74
  Bottom Layer w0.254: S266.2@113.289,21.59 113.289,29.139 ccw(c110.749,29.139) 110.749,31.679 106.362,31.679 cw(c106.362,34.219) 103.822,34.219 S252.2@103.822,40.64 107.841,44.659 ccw(c106.044,46.455) 108.584,46.455 S235.2@108.584,59.69 108.584,60.584 cw(c111.124,60.584) 111.124,63.124 113.919,63.124 113.919,63.119 cw(c113.969,62.87) 113.97,63.124 114.204,63.124 ccw(c114.204,66.675) 116.15,63.704 ccw(c114.204,66.675) 117.214,64.79 ccw(c114.204,66.675) 117.755,66.671 ccw(c114.204,66.675) 117.755,66.679 117.755,78.386 cw(c118.109,78.386) S218.2@118.109,78.74
col3: S202.2 S219.2 S236.2 S253.2 S267.2 S281.2 U301.26 | length 232.4
  Component Side w0.254: U301.26@51.469,94.036 51.982,94.549 ; 51.983,94.549 cw(c52.583,93.948) 52.583,94.798 ccw(c52.583,95.996) 53.431,95.149 U301.26@53.555,95.273 54.895,96.613 cw(c56.691,94.817) 56.691,97.357 61.11,97.357 cw(c61.11,94.363) 63.227,96.481 ; 63.227,96.48 74.878,84.83 ccw(c77.637,87.589) 74.879,84.829 ccw(c77.637,87.589) 77.637,83.687 96.519,83.687 cw(c96.519,81.147) 99.059,81.147 S219.2@99.059,78.74 ; S253.2@84.079,39.947 S253.2@84.772,40.64
  Bottom Layer w0.254: S202.2@92.709,109.855 92.709,86.142 ccw(c95.249,86.142) 93.453,84.346 S219.2@99.059,78.74 99.059,72.312 ccw(c101.599,72.312) 101.599,69.772 ; 101.599,69.772 104.775,69.772 114.204,69.772 cw(c114.204,66.675) 117.301,66.679 cw(c114.204,66.675) 117.301,66.671 cw(c114.204,66.675) 114.204,63.578 108.471,63.578 ccw(c108.471,61.038) 106.675,62.834 104.407,60.567 ; 102.206,27.612 ccw(c99.262,28.575) 101.948,30.118 ccw(c99.262,28.575) 99.262,31.672 87.312,31.672 cw(c87.312,34.212) 84.772,34.212 S253.2@84.772,40.64 88.791,44.659 ccw(c86.994,46.455) 89.534,46.455 S236.2@89.534,59.69 102.29,59.69 ccw(c102.29,62.684) 104.407,60.566 ; S281.2@102.235,5.08 95.041,12.274 cw(c96.837,14.07) 94.297,14.07 S267.2@94.297,21.59 94.297,22.938 cw(c96.837,22.938) 96.837,25.478 99.262,25.478 ccw(c99.262,28.575) 100.462,25.72 ccw(c99.262,28.575) 101.744,26.722 ccw(c99.262,28.575) 102.327,28.125
col4: S203.2 S220.2 S237.2 S254.2 S268.2 S282.2 U301.25 | length 293.3
  Component Side w0.254: U301.25@51.822,93.682 52.143,94.002 cw(c52.837,93.307) 52.837,94.29 53.113,94.29 ccw(c53.113,95.715) U301.25@54.121,94.707 ; U301.25@54.121,94.707 55.572,96.159 cw(c57.368,94.363) 57.368,96.903 61.11,96.903 cw(c61.11,94.363) 62.906,96.159 80.009,79.056 S220.2@80.009,78.74
  Bottom Layer w0.254: S203.2@73.659,109.855 81.915,109.855 cw(c81.915,107.315) 84.455,107.315 84.455,84.238 cw(c81.915,84.238) 83.711,82.442 S220.2@80.009,78.74 80.009,71.858 ccw(c82.549,71.858) 82.549,69.318 84.709,69.318 114.204,69.318 cw(c114.204,66.675) 116.847,66.679 cw(c114.204,66.675) 116.847,66.671 cw(c114.204,66.675) 114.204,64.032 73.024,64.032 ccw(c73.024,61.492) 70.484,61.492 S237.2@70.484,59.69 70.484,46.455 cw(c67.944,46.455) 69.741,44.659 S254.2@65.722,40.64 65.722,33.758 ccw(c68.262,33.758) 68.262,31.218 99.262,31.218 cw(c99.262,28.575) 101.905,28.575 cw(c99.262,28.575) 99.262,25.932 77.787,25.932 ccw(c77.787,23.392) 75.247,23.392 S268.2@75.247,21.59 75.247,9.307 ccw(c77.787,9.307) 75.991,7.511 S282.2@78.422,5.08
col5: S204.2 S221.2 S238.2 S255.2 S269.2 U301.31 | length 337.7
  Component Side w0.254: U301.31@49.701,95.803 U301.31@49.903,96.006 ; U301.31@49.904,96.006 ccw(c48.952,96.957) 50.297,96.957 50.297,97.313 cw(c51.165,97.313) U301.31@50.551,97.926 ; U301.31@50.551,97.926 U301.31@50.726,98.101 50.726,98.119 53.002,100.395 53.02,100.395 53.564,100.939 ccw(c51.767,102.735) 54.307,102.735 54.307,109.553 S204.2@54.609,109.855
  Bottom Layer w0.254: S204.2@54.614,109.99 cw(c56.246,109.99) 54.817,110.779 cw(c56.246,109.99) 56.246,111.622 66.934,111.622 cw(c66.934,109.536) 68.819,110.429 cw(c66.934,109.536) 69.02,109.536 69.02,106.553 ; S269.2@56.197,21.59 56.197,23.846 cw(c58.737,23.846) 58.737,26.386 99.262,26.386 ccw(c99.262,28.575) 101.451,28.575 ccw(c99.262,28.575) 99.262,30.764 49.212,30.764 cw(c49.212,33.304) 46.672,33.304 S255.2@46.672,40.64 50.691,44.659 ccw(c48.894,46.455) 50.805,44.781 ccw(c48.894,46.455) 51.434,46.455 S238.2@51.434,59.69 51.434,61.946 cw(c53.974,61.946) 53.974,64.486 114.204,64.486 ccw(c114.204,66.675) 116.393,66.672 ccw(c114.204,66.675) 116.393,66.678 ccw(c114.204,66.675) 114.204,68.864 67.437,68.864 63.499,68.864 cw(c63.499,71.404) 60.959,71.404 S221.2@60.959,78.74 60.959,80.151 cw(c63.499,80.151) 61.703,81.947 68.223,88.466 ccw(c66.426,90.262) 68.966,90.262 68.966,95.025 69.032,95.09 69.032,95.776 68.966,95.841 68.966,106.553
col6: S205.2 S222.2 S239.2 S256.2 S270.2 U301.22 | length 469.5
  Component Side w0.254: S222.2@41.909,78.74 42.47,79.3 cw(c44.266,77.504) 44.266,80.044 49.894,80.044 ccw(c49.894,82.584) 51.69,80.788 53.312,82.411 ; U301.22@52.53,91.808 53.801,91.808 cw(c53.801,89.756) U301.22@55.252,91.207 ccw(c55.252,93.15) 56.626,91.776 56.854,92.004 ; 53.313,82.411 cw(c54.742,80.981) 54.742,83.003 55.036,83.003 cw(c55.036,80.463) 56.832,82.259 57.773,81.318 57.802,81.291 ccw(c60.182,83.785) 60.182,80.337 61.621,80.337 61.622,80.336 65.528,80.336 ccw(c65.528,84.013) 67.332,80.809 ccw(c65.528,84.013) 68.731,82.209 ccw(c65.528,84.013) 69.204,84.013 69.204,85.552 ccw(c64.848,85.552) 67.929,88.632 64.563,91.998 ccw(c61.482,88.918) 61.482,93.274 59.941,93.274 ccw(c59.941,88.918) 56.86,91.998
  Bottom Layer w0.254: S270.2@37.147,21.59 37.147,24.3 cw(c39.687,24.3) 39.687,26.84 99.262,26.84 ccw(c99.262,28.575) 100.997,28.575 ccw(c99.262,28.575) 99.262,30.31 30.162,30.31 cw(c30.162,32.85) 27.622,32.85 S256.2@27.622,40.64 31.641,44.659 ccw(c29.844,46.455) 31.882,44.939 ccw(c29.844,46.455) 32.384,46.455 S239.2@32.384,59.69 32.384,62.4 cw(c34.924,62.4) 34.924,64.94 114.204,64.94 ccw(c114.204,66.675) 115.939,66.672 ccw(c114.204,66.675) 115.939,66.678 ccw(c114.204,66.675) 114.204,68.41 44.449,68.41 cw(c44.449,70.95) 41.909,70.95 S222.2@41.909,78.74 27.854,78.74 cw(c27.854,81.28) 26.058,79.484 19.661,85.882 cw(c21.568,87.559) 19.028,87.559 19.028,104.775 cw(c21.568,104.775) 21.568,107.315 S205.2@41.909,107.315
col7: S206.2 S223.2 S240.2 S257.2 S271.2 U301.21 | length 535.5
  Component Side w0.254: S223.2@22.859,78.74 22.859,80.337 cw(c25.399,80.337) 25.399,82.877 35.893,82.877 cw(c35.893,80.337) 37.689,82.133 37.978,81.844 ccw(c41.228,85.094) 41.228,80.498 49.706,80.498 ccw(c49.706,83.038) 51.502,81.242 53.042,82.782 cw(c54.671,81.154) 54.671,83.457 55.036,83.457 cw(c55.036,80.463) 57.153,82.581 ; U301.21@52.176,91.455 52.383,91.248 ccw(c52.964,91.83) 52.964,91.007 53.804,91.007 cw(c53.804,89.759) U301.21@54.686,90.641 ; U301.21@54.686,90.641 54.907,90.421 ccw(c55.377,90.892) 55.377,90.226 ccw(c55.377,91.078) 55.979,90.475 ; 55.98,90.475 57.181,91.677 cw(c59.941,88.918) 57.182,91.678 cw(c59.941,88.918) 59.941,92.82 61.482,92.82 cw(c61.482,88.918) 64.241,91.678 cw(c61.482,88.918) 64.242,91.677 67.608,88.311 cw(c64.848,85.552) 67.609,88.31 cw(c64.848,85.552) 68.75,85.552 68.75,84.201 cw(c65.34,84.201) 68.153,82.272 cw(c65.34,84.201) 67.268,81.388 cw(c65.34,84.201) 65.34,80.79 61.81,80.79 61.809,80.791 60.182,80.791 cw(c60.182,83.785) 58.066,81.667 ; 57.153,82.58 58.065,81.668
  Bottom Layer w0.254: S206.2@6.954,109.855 6.954,95.697 ccw(c9.494,95.697) 7.698,93.901 S223.2@22.859,78.74 22.859,70.496 ccw(c25.399,70.496) 25.399,67.956 114.204,67.956 cw(c114.204,66.675) 115.485,66.678 cw(c114.204,66.675) 115.485,66.672 cw(c114.204,66.675) 114.204,65.394 15.874,65.394 ccw(c15.874,62.854) 13.334,62.854 S240.2@13.334,59.69 13.334,46.455 cw(c10.794,46.455) 12.705,44.781 cw(c10.794,46.455) 12.591,44.659 S257.2@8.572,40.64 8.572,32.396 ccw(c11.112,32.396) 11.112,29.856 99.262,29.856 cw(c99.262,28.575) 100.543,28.575 cw(c99.262,28.575) 99.262,27.294 20.637,27.294 ccw(c20.637,24.754) 18.097,24.754 S271.2@18.097,21.59
col8: S207.2 S224.2 S241.2 S258.2 S272.2 S283.2 U301.20 | length 583
  Component Side w0.254: S224.2@3.809,78.74 3.809,80.791 cw(c6.349,80.791) 6.349,83.331 35.893,83.331 cw(c35.893,80.337) 38.01,82.454 38.3,82.165 ccw(c41.228,85.094) 41.228,80.952 49.518,80.952 ccw(c49.518,83.492) 51.314,81.696 52.785,83.167 cw(c54.581,81.371) 54.581,83.911 55.036,83.911 cw(c55.036,80.463) 57.474,82.901 58.12,82.255 ccw(c60.559,84.693) 60.559,81.245 61.997,81.245 61.998,81.244 65.152,81.244 ccw(c65.152,84.389) 68.296,84.389 68.296,85.552 ccw(c64.848,85.552) 67.287,87.99 63.921,91.356 ccw(c61.482,88.918) 61.482,92.366 59.941,92.366 ccw(c59.941,88.918) 57.502,91.356 56.032,89.885 cw(c55.171,90.996) 55.171,89.591 cw(c55.171,90.958) 54.205,89.991 U301.20@54.121,90.076 ccw(c52.968,88.924) 52.968,90.553 52.677,90.553 cw(c52.837,91.64) 52.06,90.863 U301.20@51.822,91.101
  Bottom Layer w0.254: S207.2@-12.066,109.855 -12.066,95.667 ccw(c-9.526,95.667) -11.322,93.871 S224.2@3.809,78.74 3.809,70.496 cw(c1.269,70.496) 1.269,67.956 -104.796,67.956 ccw(c-104.796,66.675) -106.076,66.678 ccw(c-104.796,66.675) -106.076,66.672 ccw(c-104.796,66.675) -104.796,65.394 -8.256,65.394 cw(c-8.256,62.854) -5.716,62.854 S241.2@-5.716,59.69 -5.716,46.455 cw(c-8.256,46.455) -6.218,44.939 cw(c-8.256,46.455) -6.459,44.659 S258.2@-10.478,40.64 -10.478,32.396 cw(c-13.018,32.396) -13.018,29.856 -89.737,29.856 ccw(c-89.737,28.575) -89.737,27.294 -3.493,27.294 cw(c-3.493,24.754) -0.953,24.754 S272.2@-0.953,21.59 -0.953,6.667 cw(c-2.54,6.667) S283.2@-2.54,5.08
col9: S208.2 S225.2 S242.2 S259.2 S273.2 U301.19 | length 509.4
  Component Side w0.254: S259.2@-29.967,40.201 S259.2@-29.528,40.64 ; S225.2@-15.241,78.74 -15.241,81.245 cw(c-12.701,81.245) -12.701,83.785 35.893,83.785 cw(c35.893,80.337) 38.331,82.775 38.621,82.486 ccw(c41.228,85.094) 41.228,81.406 49.141,81.406 ccw(c49.141,84.4) 51.258,82.282 ccw(c49.141,84.4) 51.259,82.284 52.718,83.742 cw(c54.222,82.238) 54.222,84.365 55.036,84.365 cw(c55.036,80.463) 57.794,83.223 cw(c55.036,80.463) 57.795,83.222 58.176,82.842 ccw(c60.935,85.601) 58.177,82.841 ccw(c60.935,85.601) 60.935,81.699 62.185,81.699 62.186,81.698 64.964,81.698 ccw(c64.964,84.577) 67.842,84.577 67.842,85.552 ccw(c64.848,85.552) 66.966,87.668 ; U301.19@51.469,90.747 51.817,90.399 ccw(c52.542,91.123) 52.542,90.099 cw(c52.542,89.075) 53.266,89.799 U301.19@53.555,89.51 U301.19@53.573,89.491 ; U301.19@53.574,89.491 ccw(c54.996,90.914) 54.996,88.902 ccw(c54.996,90.577) 56.181,89.393 57.823,91.035 ; 57.824,91.036 cw(c59.941,88.918) 59.941,91.912 61.482,91.912 cw(c61.482,88.918) 63.599,91.036 ; 63.6,91.035 66.966,87.669
  Bottom Layer w0.254: S208.2@-31.116,109.855 -31.116,95.667 ccw(c-28.576,95.667) -30.372,93.871 S225.2@-15.241,78.74 -15.241,70.95 cw(c-17.781,70.95) -17.781,68.41 -104.796,68.41 ccw(c-104.796,66.675) -106.53,66.678 ccw(c-104.796,66.675) -106.53,66.672 ccw(c-104.796,66.675) -104.796,64.94 -27.306,64.94 cw(c-27.306,62.4) -24.766,62.4 S242.2@-24.766,59.69 -24.766,46.455 cw(c-27.306,46.455) -25.509,44.659 -29.178,40.99 S259.2@-29.178,40.64 ; S259.2@-29.528,40.64 -29.528,32.85 cw(c-32.068,32.85) -31.584,30.357 cw(c-32.068,32.85) -32.068,30.31 -89.737,30.31 ccw(c-89.737,28.575) -91.472,28.575 ccw(c-89.737,28.575) -89.737,26.84 -22.543,26.84 cw(c-22.543,24.3) -20.003,24.3 S273.2@-20.003,21.59
col10: S209.2 S226.2 S243.2 S260.2 S274.2 U301.18 | length 452.3
  Component Side w0.254: S226.2@-34.291,78.74 -34.291,81.699 cw(c-31.751,81.699) -31.751,84.239 35.893,84.239 cw(c35.893,80.337) 38.653,83.096 38.942,82.807 ccw(c41.228,85.094) 41.228,81.86 49.141,81.86 ccw(c49.141,84.4) 50.937,82.604 52.417,84.084 cw(c54.214,82.288) 54.001,84.819 55.036,84.819 cw(c55.036,80.463) 58.116,83.543 58.231,83.429 ccw(c61.311,86.509) 61.311,82.153 62.373,82.153 62.374,82.152 64.848,82.152 ccw(c64.848,84.692) 67.388,84.692 67.388,85.552 ccw(c64.848,85.552) 66.645,87.348 63.278,90.714 ccw(c61.482,88.918) 61.482,91.458 59.941,91.458 ccw(c59.941,88.918) 58.145,90.714 56.266,88.836 cw(c55.33,89.773) 55.33,88.448 54.188,88.448 cw(c54.188,90.143) U301.18@52.99,88.943 ; U301.18@51.115,90.394 51.745,89.764 ccw(c52.47,90.488) 52.102,89.532 cw(c52.102,88.809) 52.404,89.466 cw(c52.102,88.809) 52.613,89.321 U301.18@52.989,88.944
  Bottom Layer w0.254: S209.2@-50.166,109.855 -50.166,95.667 ccw(c-47.626,95.667) -49.422,93.871 S226.2@-34.291,78.74 -34.291,71.404 cw(c-36.831,71.404) -36.831,68.864 -104.796,68.864 ccw(c-104.796,66.675) -106.984,66.678 ccw(c-104.796,66.675) -106.984,66.672 ccw(c-104.796,66.675) -104.796,64.486 -46.356,64.486 cw(c-46.356,61.946) -43.816,61.946 S243.2@-43.816,59.69 -43.816,46.455 cw(c-46.356,46.455) -44.318,44.939 cw(c-46.356,46.455) -44.559,44.659 S260.2@-48.578,40.64 -48.578,33.304 cw(c-51.118,33.304) -51.118,30.764 -89.737,30.764 ccw(c-89.737,28.575) -91.926,28.575 ccw(c-89.737,28.575) -89.737,26.386 -41.593,26.386 cw(c-41.593,23.846) -39.052,23.846 S274.2@-39.052,21.59
col11: S210.2 S227.2 S244.2 S261.2 S275.2 U301.12 | length 364
  Component Side w0.254: S227.2@-53.341,78.74 -53.341,82.153 cw(c-50.801,82.153) -50.801,84.693 35.893,84.693 cw(c35.893,80.337) 38.974,83.417 39.263,83.128 ccw(c41.228,85.094) 41.228,82.314 43.726,82.314 ccw(c43.726,84.502) 45.273,82.955 ; 45.273,82.955 46.374,84.055 46.619,84.301 46.939,84.621 cw(c47.119,84.441) 47.06,84.689 ccw(c46.926,85.25) 47.172,84.728 ccw(c46.926,85.25) 47.333,84.841 47.464,84.972 47.595,85.103 cw(c47.775,84.924) 47.636,85.137 cw(c49.026,83.01) 49.026,85.55 U301.12@49.595,85.55 cw(c51.046,87.001) 48.994,87.001 U301.12@48.994,88.273
  Bottom Layer w0.254: S210.2@-78.741,109.855 -78.741,101.19 ccw(c-76.201,101.19) -77.997,99.394 -62.714,84.112 ccw(c-60.918,85.908) -60.918,83.368 -58.923,83.368 cw(c-58.923,81.065) -57.294,82.693 S227.2@-53.341,78.74 -53.341,71.858 cw(c-55.881,71.858) -55.881,69.318 -104.796,69.318 ccw(c-104.796,66.675) -107.438,66.679 ccw(c-104.796,66.675) -107.438,66.671 ccw(c-104.796,66.675) -104.796,64.032 -65.406,64.032 cw(c-65.406,61.492) -62.866,61.492 S244.2@-62.866,59.69 -62.866,46.455 cw(c-65.406,46.455) -63.368,44.939 cw(c-65.406,46.455) -63.609,44.659 S261.2@-67.628,40.64 -67.628,33.758 cw(c-70.168,33.758) -70.168,31.218 -89.737,31.218 ccw(c-89.737,28.575) -92.38,28.575 ccw(c-89.737,28.575) -89.737,25.932 -60.643,25.932 cw(c-60.643,23.392) -58.103,23.392 S275.2@-58.103,21.59
col12: S211.2 S228.2 S245.2 S262.2 S276.2 S284.2 U301.11 | length 323.4
  Component Side w0.254: S228.2@-72.391,78.74 -72.391,82.607 cw(c-69.851,82.607) -69.851,85.147 35.893,85.147 cw(c35.893,80.337) 39.295,83.738 39.584,83.449 ccw(c41.228,85.094) 41.228,82.768 43.726,82.768 ccw(c43.726,84.502) 44.952,83.276 U301.11@47.226,85.55 47.417,85.741 ccw(c46.426,86.732) 47.827,86.732 U301.11@47.827,88.273
  Bottom Layer w0.254: -107.864,66.258 ccw(c-104.796,66.675) -107.709,65.625 ccw(c-104.796,66.675) -106.578,64.143 ccw(c-104.796,66.675) -104.796,63.578 -91.338,63.578 cw(c-91.338,62.097) -89.862,62.225 ; -107.865,66.26 cw(c-104.796,66.675) -107.862,67.107 cw(c-104.796,66.675) -104.796,69.772 -74.931,69.772 ccw(c-74.931,72.312) -72.391,72.312 S228.2@-72.391,78.74 -77.164,83.513 ccw(c-78.96,81.717) -78.96,84.257 -80.603,84.257 cw(c-80.603,86.797) -82.399,85.001 -97.047,99.648 cw(c-95.251,101.444) -97.791,101.444 S211.2@-97.791,109.855 ; -89.857,62.097 cw(c-88.266,62.23) -89.862,62.225 ; -88.265,60.633 -83.911,60.633 cw(c-83.911,58.093) -82.115,59.889 S245.2@-81.916,59.69 -81.916,46.455 cw(c-84.456,46.455) -82.418,44.939 cw(c-84.456,46.455) -82.659,44.659 S262.2@-86.678,40.64 -86.678,34.212 cw(c-89.218,34.212) -89.218,31.672 -89.737,31.672 ccw(c-89.737,28.575) -92.834,28.575 ccw(c-89.737,28.575) -89.737,25.478 -87.593,25.478 cw(c-87.593,23.678) -85.793,23.678 ccw(c-84.194,23.678) -84.194,22.079 -77.642,22.079 S276.2@-77.153,21.59 -77.153,12.482 cw(c-79.693,12.482) -77.719,10.884 cw(c-79.693,12.482) -77.897,10.686 S284.2@-83.502,5.08 ; -88.265,60.633 cw(c-88.266,62.23) -89.862,62.225
col13: S212.2 S229.2 S246.2 S263.2 S277.2 S285.2 U301.10 | length 308.1
  Component Side w0.254: S229.2@-91.441,78.74 -91.441,83.061 cw(c-88.901,83.061) -88.901,85.601 35.893,85.601 cw(c35.893,80.337) 39.616,84.059 39.905,83.77 ccw(c41.228,85.094) 41.228,83.222 43.097,83.222 ccw(c43.097,84.956) 44.324,83.73 46.661,86.067 ccw(c45.908,86.82) 46.827,86.282 ccw(c45.908,86.82) 46.972,86.82 46.972,87.686 cw(c48.032,87.686) 47.283,88.435 U301.10@47.474,88.626
  Bottom Layer w0.254: S212.2@-116.841,109.855 -116.841,101.571 ccw(c-114.301,101.571) -116.097,99.775 -101.132,84.81 ccw(c-99.336,86.607) -99.336,84.067 -97.819,84.067 cw(c-97.819,81.527) -96.023,83.323 S229.2@-91.441,78.74 -91.441,72.771 cw(c-93.981,72.771) -93.981,70.231 -105.029,70.231 cw(c-105.126,70.466) -105.104,70.213 ccw(c-104.796,66.675) -107.573,68.887 ccw(c-104.796,66.675) -108.295,67.276 ; S277.2@-112.771,21.59 cw(c-110.231,21.59) -110.231,24.13 -109.913,24.13 -116.897,31.114 cw(c-115.101,32.91) -117.641,32.91 S263.2@-117.641,40.64 -115.844,42.436 cw(c-114.048,40.64) -114.048,43.18 S263.2@-112.084,43.18 -112.084,49.078 cw(c-109.544,49.078) -109.544,51.618 -103.506,51.618 ccw(c-103.506,54.158) -100.966,54.158 S246.2@-100.966,59.69 ccw(c-101.914,59.69) -100.977,59.835 -101.036,59.895 ccw(c-102.832,58.098) -102.832,60.638 ccw(c-102.832,60.384) -102.834,60.638 -107.314,60.633 cw(c-107.316,62.23) -108.91,62.147 ; S277.2@-109.596,24.13 -109.596,8.413 ccw(c-107.056,8.413) -108.852,6.617 S285.2@-107.315,5.08 ; -108.91,62.148 cw(c-107.316,62.23) -108.422,63.381 ccw(c-108.598,63.564) -108.421,63.382 ccw(c-108.598,63.564) -108.344,63.566 -108.344,66.548 cw(c-104.796,66.675) -108.223,67.604